# EAGLE board V8Print1 (EAGLE 5.12), part 1 of 2
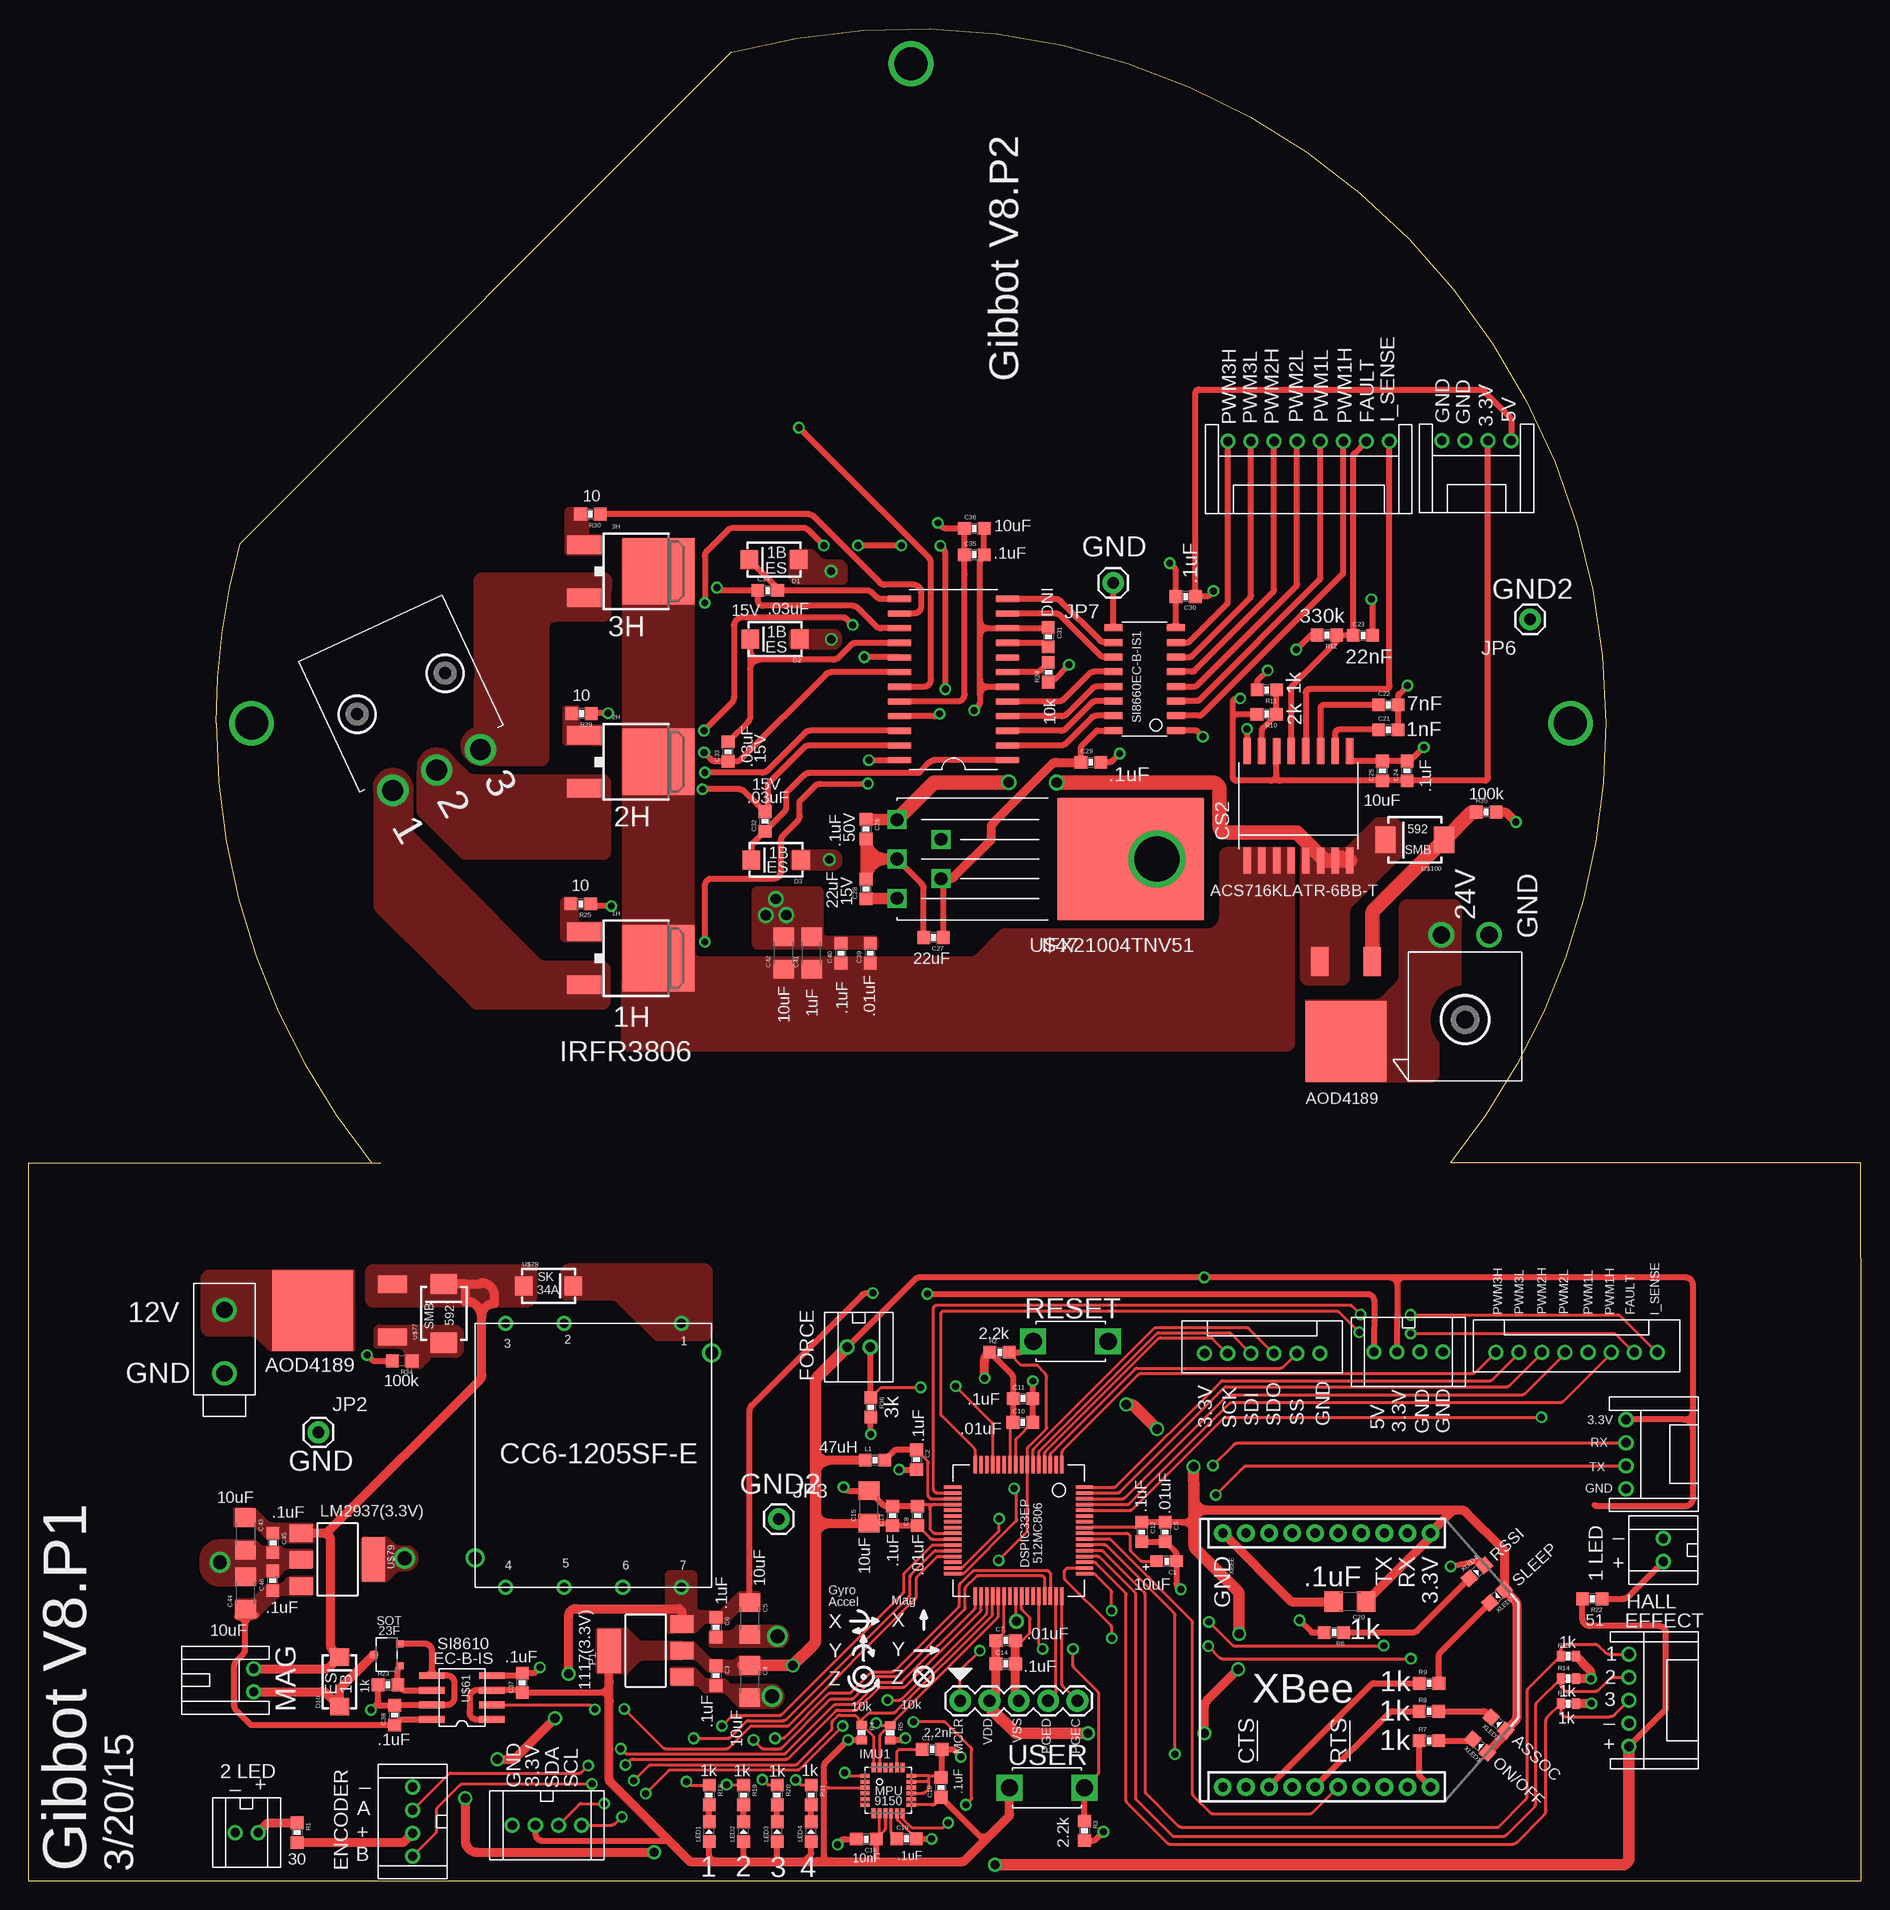
[diagram p0: board, top side]
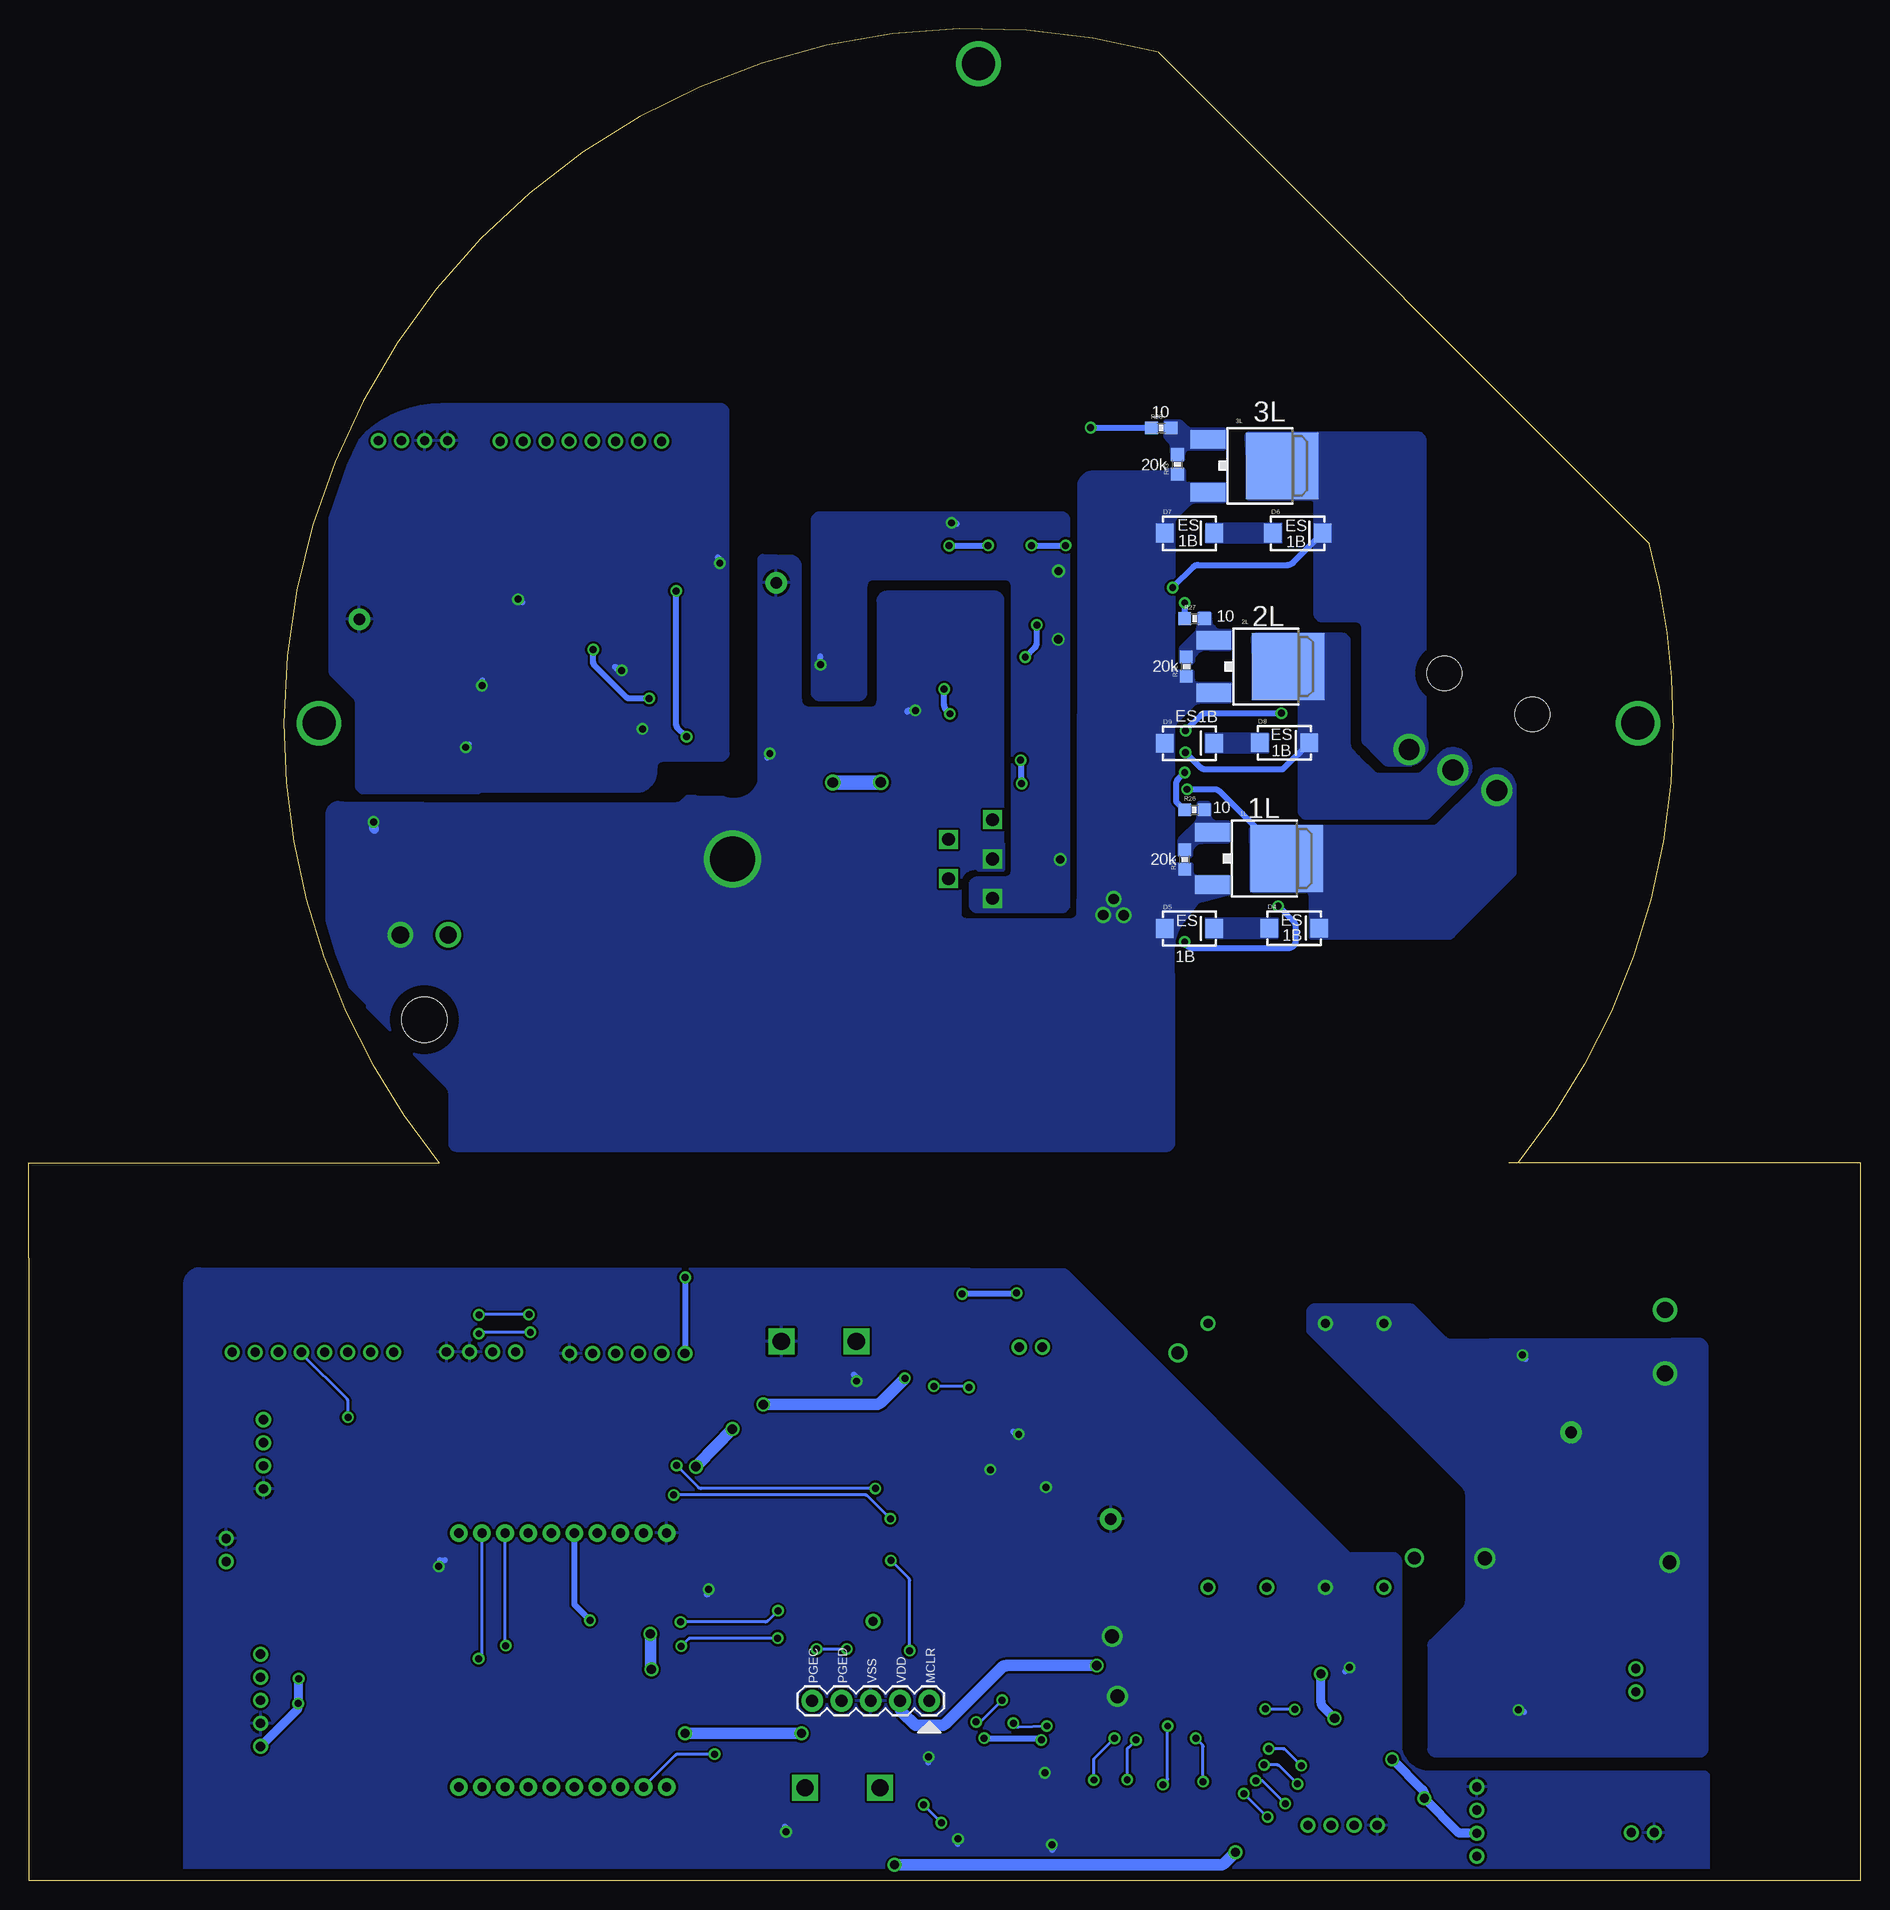
[diagram p1: board, bottom side, seen from below]

Size 158.75 x 160.48 mm. Coordinates in mm from the lower left corner, seen from the top.
Outline: 123.19,62.21 arc39 136.65,100.31 arc105 60.87,158.46 18.31,115.89 arc15 16.25,100.31 arc39 29.72,62.21
Outline: 30.48,62.2 0,62.2 0,53.97 0,0 158.75,0 158.75,53.31 158.75,53.97 158.75,62.2 123.19,62.2
Copper layers (1*16): Top 0.035mm / dielectric 1.5mm / Bottom 0.035mm
Design rules "default": minimum track width 10mil, minimum drill 24mil, track to track 8mil, track to pad 8mil, pad to pad 8mil, via to via 8mil, smd to smd 8mil, copper to edge 40mil, drill to drill 8mil, minimum pad ring 10mil, minimum via ring 8mil, stop-mask expansion 4mil, vias tented up to drill 0mil, thermal gap 10mil

## Footprints (pad centres in the part's own frame; a part is rotated, then mirrored left to right if it is on the bottom)
DPAK = smd 5.791 x 6.274: D 0,1.587 | smd 1.6 x 3: G -2.286,-4.851; S 2.286,-4.851
0603-POL = smd 1.1 x 1: + 0.85,0; - -0.85,0
0603 = smd 1.1 x 1.1: 1 -0.85,0; 2 0.85,0
1206 = smd 1.6 x 1.8: 1 -1.4,0; 2 1.4,0
SOIC16-W = smd 0.65 x 2.25: 1 -4.445,-4.75; 2 -3.175,-4.75; 3 -1.905,-4.75; 4 -0.635,-4.75; 5 0.635,-4.75; 6 1.905,-4.75; 7 3.175,-4.75; 8 4.445,-4.75; 9 4.445,4.75; 10 3.175,4.75; 11 1.905,4.75; 12 0.635,4.75; 13 -0.635,4.75; 14 -1.905,4.75; 15 -3.175,4.75; 16 -4.445,4.75
SMA-DIODE = smd 1.52 x 1.63: A -2.15,0; C 2.15,0
LGA24_4X4 = smd 0.8 x 0.35: 1 -2,1.25; 2 -2,0.75; 3 -2,0.25; 4 -2,-0.25; 5 -2,-0.75; 6 -2,-1.25; 13 2,-1.25; 14 2,-0.75; 15 2,-0.25; 16 2,0.25; 17 2,0.75; 18 2,1.25 | smd 0.35 x 0.85: 7 -1.25,-1.975; 8 -0.75,-1.975; 9 -0.25,-1.975; 10 0.25,-1.975; 11 0.75,-1.975; 12 1.25,-1.975; 19 1.25,1.975; 20 0.75,1.975; 21 0.25,1.975; 22 -0.25,1.975; 23 -0.75,1.975; 24 -1.25,1.975
1X01_TEST = drill 0.762 round: 1 0,0
1X01 = drill 1.016 pad 1.88 round: 1 0,0
JST-4-PH-TH = drill 0.8 round: 1 -3,-6.35; 2 -1,-6.35; 3 1,-6.35; 4 3,-6.35
JST-4-PH-V = drill 0.8 round: 1 -3,0; 2 -1,0; 3 1,0; 4 3,0
MOLEX-2-MINIFITJR-V2 = drill 1.397 round: P$1 0,0; P$2 0,5.512
JST-2-PH-V = drill 0.8 round: 1 -1,0; 2 1,0
JST-2-PH-TH = drill 0.8 round: 1 -1,-6.35; 2 1,-6.35
MOLEX-3-MINIFITJR-RA = drill 1.803 round: 1 4.191,13.538; 2 0,13.538; 3 -4.191,13.538 | hole 3: -4.204,6.248; 4.204,6.248
TE-MINIMATENLOK-2 = drill 1.48 round: 1 -2.07,12.67; 2 2.07,12.67 | hole 3.91: 0,5.33
0603-DIODE = smd 1.1 x 1.1: AN -0.85,0; CAT 0.85,0
SOT23F = smd 0.6 x 0.65: D 0,1.125; G -0.95,-1.125; S 0.95,-1.125
SOIC24-W = smd 0.533 x 1.981: 1 -6.985,-4.686; 2 -5.715,-4.686; 3 -4.445,-4.686; 4 -3.175,-4.686; 5 -1.905,-4.686; 6 -0.635,-4.686; 7 0.635,-4.686; 8 1.905,-4.686; 9 3.175,-4.686; 10 4.445,-4.686; 11 5.715,-4.686; 12 6.985,-4.686; 13 6.985,4.686; 14 5.715,4.686; 15 4.445,4.686; 16 3.175,4.686; 17 1.905,4.686; 18 0.635,4.686; 19 -0.635,4.686; 20 -1.905,4.686; 21 -3.175,4.686; 22 -4.445,4.686; 23 -5.715,4.686; 24 -6.985,4.686
SOT223 = smd 1.499 x 2.007: 1 -2.261,-3.15; 2 0.025,-3.15; 3 2.311,-3.15 | smd 3.81 x 2.007: 4 0,3.15
CC6-2405SF-E = drill 0.8 round: 1 -11.43,7.62; 2 -11.43,-2.54; 3 -11.43,-7.62; 4 11.43,-7.62; 5 11.43,-2.54; 6 11.43,2.54; 7 11.43,7.62 | drill 1.1 round: P$9 8.89,-10.25; P$10 -8.89,10.25
1X05-PICKIT3 = drill 1.016 pad 1.88 round: MCLR 1.27,-1.016; PGEC 11.43,-1.016; PGED 8.89,-1.016; VDD 3.81,-1.016; VSS 6.35,-1.016
0402 = smd 0.7 x 0.9: 1 -0.65,0; 2 0.65,0
TACTILE_SWITCH = drill 1.5 square: 1 -3.25,0; 2 3.25,0
TQFP64_10X10 = smd 1.5 x 0.3: 1 -5.7,3.75; 2 -5.7,3.25; 3 -5.7,2.75; 4 -5.7,2.25; 5 -5.7,1.75; 6 -5.7,1.25; 7 -5.7,0.75; 8 -5.7,0.25; 9 -5.7,-0.25; 10 -5.7,-0.75; 11 -5.7,-1.25; 12 -5.7,-1.75; 13 -5.7,-2.25; 14 -5.7,-2.75; 15 -5.7,-3.25; 16 -5.7,-3.75; 33 5.7,-3.75; 34 5.7,-3.25; 35 5.7,-2.75; 36 5.7,-2.25; 37 5.7,-1.75; 38 5.7,-1.25; 39 5.7,-0.75; 40 5.7,-0.25; 41 5.7,0.25; 42 5.7,0.75; 43 5.7,1.25; 44 5.7,1.75; 45 5.7,2.25; 46 5.7,2.75; 47 5.7,3.25; 48 5.7,3.75 | smd 0.3 x 1.5: 17 -3.75,-5.7; 18 -3.25,-5.7; 19 -2.75,-5.7; 20 -2.25,-5.7; 21 -1.75,-5.7; 22 -1.25,-5.7; 23 -0.75,-5.7; 24 -0.25,-5.7; 25 0.25,-5.7; 26 0.75,-5.7; 27 1.25,-5.7; 28 1.75,-5.7; 29 2.25,-5.7; 30 2.75,-5.7; 31 3.25,-5.7; 32 3.75,-5.7; 49 3.75,5.7; 50 3.25,5.7; 51 2.75,5.7; 52 2.25,5.7; 53 1.75,5.7; 54 1.25,5.7; 55 0.75,5.7; 56 0.25,5.7; 57 -0.25,5.7; 58 -0.75,5.7; 59 -1.25,5.7; 60 -1.75,5.7; 61 -2.25,5.7; 62 -2.75,5.7; 63 -3.25,5.7; 64 -3.75,5.7
JST-6-PH-V = drill 0.8 round: 1 -5,0; 2 -3,0; 3 -1,0; 4 1,0; 5 3,0; 6 5,0
SOIC16-N = smd 0.6 x 1.55: 1 -4.445,-2.7; 2 -3.175,-2.7; 3 -1.905,-2.7; 4 -0.635,-2.7; 5 0.635,-2.7; 6 1.905,-2.7; 7 3.175,-2.7; 8 4.445,-2.7; 9 4.445,2.7; 10 3.175,2.7; 11 1.905,2.7; 12 0.635,2.7; 13 -0.635,2.7; 14 -1.905,2.7; 15 -3.175,2.7; 16 -4.445,2.7
TO220-5 = drill 1.1 square: 1 3.81,-3.404; 2 0,-1.702; 3 3.81,0; 4 0,1.702; 5 3.81,3.404 | smd 12.7 x 10.541: PAD -16.434,0 | drill 3.937 round: PAD2 -18.72,0
SOIC8-N = smd 2.2 x 0.6: 1 -2.6,1.905; 2 -2.6,0.635; 3 -2.6,-0.635; 4 -2.6,-1.905; 5 2.6,-1.905; 6 2.6,-0.635; 7 2.6,0.635; 8 2.6,1.905
4-40 = drill 2.845 round: P$1 0,0
D-PAK = smd 7.01 x 7.01: D 0,0 | smd 1.499 x 2.515: G -2.286,-6.909; S 2.286,-6.909
SMB-DIODE = smd 1.75 x 2.3: A -2.54,0; C 2.54,0
JST-5-PH = drill 0.8 round: 1 -4,0; 2 -2,0; 3 0,0; 4 2,0; 5 4,0
JST-8-PH-V = drill 0.8 round: 1 -7,0; 2 -5,0; 3 -3,0; 4 -1,0; 5 1,0; 6 3,0; 7 5,0; 8 7,0
JST-8-PH-TH = drill 0.8 round: 1 -7,-6.35; 2 -5,-6.35; 3 -3,-6.35; 4 -1,-6.35; 5 1,-6.35; 6 3,-6.35; 7 5,-6.35; 8 7,-6.35
XBEE-SILK = drill 0.8 pad 1.524 round: 1 -11,20; 2 -11,18; 3 -11,16; 4 -11,14; 5 -11,12; 6 -11,10; 7 -11,8; 8 -11,6; 9 -11,4; 10 -11,2; 11 11,2; 12 11,4; 13 11,6; 14 11,8; 15 11,10; 16 11,12; 17 11,14; 18 11,16; 19 11,18; 20 11,20

## Placement (x,y rotation side)
1H  IRFR3806  [DPAK]  52.98,79.94 270 top
1L  IRFR3806  [DPAK]  51.33,88.58 270 bottom
2H  IRFR3806  [DPAK]  52.98,96.96 270 top
2L  IRFR3806  [DPAK]  51.2,105.21 270 bottom
3H  IRFR3806  [DPAK]  52.98,113.47 270 top
3L  IRFR3806  [DPAK]  51.71,122.61 270 bottom
C1  10uF  [0603-POL]  98.6,27.69 180 top
C2  .1uF  [0603]  76.92,36.49 270 top
C3  .1uF  [0603]  59.55,17.77 270 top
C4  10uF  [1206]  62.47,17.26 270 top
C5  10uF  [1206]  62.47,22.72 270 top
C6  .1uF  [0603]  59.55,21.96 270 top
C7  .01uF  [0603]  84.66,20.82 0 top
C8  .01uF  [0603]  77.01,31.62 90 top
C9  .01uF  [0603]  98.48,30.23 270 top
C10  .01uF  [0603]  86.14,39.71 0 top
C11  .1uF  [0603]  86.16,41.78 0 top
C12  .1uF  [0603]  96.44,30.23 270 top
C13  .1uF  [0603]  74.85,31.62 90 top
C14  .1uF  [0603]  84.66,18.8 0 top
C15  10uF  [1206]  72.82,32.39 90 top
C16  .1uF  [0603]  79.04,8.08 90 top
C17  2.2nF  [0603]  78.28,11.38 0 top
C18  10nF  [0603]  72.58,3.61 180 top
C19  .1uF  [0603]  76.06,3.63 0 top
C20  .1uF  [1206]  114.49,24.18 180 top
C21  1nF  [0603]  117.82,99.74 0 top
C22  7nF  [0603]  117.82,101.9 0 top
C23  22nF  [0603]  115.62,107.92 0 top
C24  .1uF  [0603]  119.44,96.17 90 top
C25  10uF  [0603]  117.31,96.17 90 top
C26  .1uF 48V  [0603]  72.55,91.14 270 top
C27  22uF  [0603]  78.4,81.74 180 top
C28  22uF 15V  [0603]  72.55,85.94 90 top
C29  .1uF  [0603]  92.04,96.92 0 top
C30  .1uF  [0603]  100.25,111.28 180 top
C31  DNI  [0603]  88.35,107.78 270 top
C32  .03uF 15V  [0603]  63.8,91.8 90 top
C33  .03uF 15V  [0603]  60.6,97.85 90 top
C34  .03uF 15V  [0603]  64.03,111.82 0 top
C35  .1uF  [0603]  81.94,114.9 0 top
C36  10uF  [0603]  81.94,117.19 0 top
C37  .1uF  [0603]  42.76,17.14 90 top
C38  .1uF  [0603]  31.7,14.35 90 top
C39  .01uF  [0603]  72.92,80.39 90 top
C40  .1uF  [0603]  70.38,80.39 90 top
C41  1uF  [1206]  67.84,80.39 90 top
C42  10uF  [1206]  65.43,80.39 90 top
C43  10uF  [1206]  18.77,30.06 270 top
C44  10uF  [1206]  18.78,24.96 90 top
C45  .1uF  [0603]  21.16,29.27 270 top
C46  .1uF  [0603]  21.15,26 90 top
CS2  ACS716KLATR-6BB-T  [SOIC16-W]  110.03,93.15 0 top
D1  ES1B  [SMA-DIODE]  64.58,114.49 180 top
D2  ES1B  [SMA-DIODE]  64.67,107.6 180 top
D3  ES1B  [SMA-DIODE]  64.77,88.46 180 top
D4  ES1B  [SMA-DIODE]  49.1,82.54 0 bottom
D5  ES1B  [SMA-DIODE]  58.16,82.52 0 bottom
D6  ES1B  [SMA-DIODE]  48.79,116.77 0 bottom
D7  ES1B  [SMA-DIODE]  58.16,116.77 0 bottom
D8  ES1B  [SMA-DIODE]  49.93,98.61 0 bottom
D9  ES1B  [SMA-DIODE]  58.16,98.57 0 bottom
D10  ES1B  [SMA-DIODE]  26.92,17.23 90 top
IMU1  MPU-9150  [LGA24_4X4]  74.47,7.82 0 top
JP1  M01TEST  [1X01_TEST]  85.59,22.48 0 top
JP2  GND  [1X01]  25.1,38.85 0 top
JP3  GND2  [1X01]  64.99,31.34 0 top
JP4  [JST-4-PH-TH]  144.77,36.96 270 top
JP5  [JST-4-PH-V]  33.26,5.12 270 top
JP6  GND2  [1X01]  130.11,109.31 180 top
JP7  GND1  [1X01]  93.98,112.48 180 top
JP8  [JST-4-PH-V]  119.56,45.83 0 top
JP9  [JST-4-PH-TH]  125.46,118.44 180 top
JP10  [MOLEX-2-MINIFITJR-V2]  16.95,43.95 0 top
JP11  [JST-2-PH-V]  141.66,28.65 270 top
JP12  [JST-2-PH-V]  71.92,46.24 0 top
JP13  [JST-2-PH-V]  18.87,4.17 0 top
JP14  [JST-2-PH-TH]  13.13,17.37 90 top
JP15  [MOLEX-3-MINIFITJR-RA]  29.62,108.53 205 top
JP16  [JST-4-PH-V]  44.89,4.81 0 top
JP17  [TE-MINIMATENLOK-2]  124.48,69.29 0 top
L1  47uH  [0603]  73.33,36.45 0 top
LED1  [0603-DIODE]  58.97,4.25 90 top
LED2  [0603-DIODE]  61.94,4.25 90 top
LED3  [0603-DIODE]  64.86,4.25 90 top
LED4  [0603-DIODE]  67.81,4.25 90 top
M1  N-MOSSOT23F  [SOT23F]  31.01,19.58 90 top
MD1  HIP4086  [SOIC24-W]  80.14,104.1 90 top
P1  LINEAR-REG1117  [SOT223]  53.45,19.93 90 top
P2  DC-DC-CONVERTER1.2A  [CC6-2405SF-E]  48.93,36.86 270 top
PROG  [1X05-PICKIT3]  79.44,16.61 0 top
PROG1  [1X05-PICKIT3]  79.44,14.58 180 bottom
R1  30  [0603]  23.25,4.17 270 top
R2  2.2k  [0603]  84.12,45.8 0 top
R3  2.2k  [0603]  91.48,4.33 270 top
R4  10k  [0402]  72.17,12.84 270 top
R5  10k  [0402]  74.65,12.81 270 top
R6  1k  [0603]  113.11,21.51 180 top
R7  1k  [0603]  121.34,12.14 0 top
R8  1k  [0603]  121.34,14.68 0 top
R9  1k  [0603]  121.35,17.11 0 top
R10  2k  [0603]  107.27,101.09 180 top
R11  1k  [0603]  107.29,103.19 180 top
R12  330k  [0603]  112.49,107.94 180 top
R13  1k  [0402]  133.4,15.34 0 top
R14  1k  [0402]  133.4,17.51 0 top
R15  1k  [0402]  133.4,19.47 0 top
R18  1k  [0603]  58.97,7.43 270 top
R19  1k  [0603]  61.94,7.43 270 top
R20  1k  [0603]  64.86,7.43 270 top
R21  1k  [0603]  67.81,7.43 270 top
R22  51  [0603]  135.5,24.43 180 top
R23  1k  [0603]  31.13,16.98 0 top
R24  10k  [0603]  88.35,104.73 90 top
R25  10  [0603]  47.83,84.65 180 top
R26  10  [0603]  57.75,92.81 0 bottom
R27  10  [0603]  57.72,109.38 0 bottom
R28  10  [0603]  60.62,125.9 0 bottom
R29  10  [0603]  47.9,101.15 180 top
R30  10  [0603]  48.66,118.42 180 top
R31  20k  [0603]  58.58,88.5 90 bottom
R32  20k  [0603]  58.44,105.21 90 bottom
R33  20k  [0603]  59.21,122.74 90 bottom
R34  100k  [0603]  32.36,45.05 180 top
R35  100k  [0603]  126.3,92.62 0 top
R36  3k  [0603]  72.96,41.02 270 top
RESET1  TACTILE_SWITCH  [TACTILE_SWITCH]  90.28,46.74 0 top
U$1  DSPIC33EP512MC806  [TQFP64_10X10]  85.78,30.35 270 top
U$38  JST-6-PH-V  [JST-6-PH-V]  106.9,45.71 0 top
U$46  DIGITAL-ISOLATOR-6CHSI8660EC-B-IS1  [SOIC16-N]  96.7,104.13 90 top
U$47  IFX21004TNV51  [TO220-5]  79.04,88.54 180 top
U$61  DIGITAL-ISOLATOR-1CHSOIC8-N  [SOIC8-N]  37.54,15.88 180 top
U$64  4-40  [4-40]  76.45,157.46 90 top
U$65  4-40  [4-40]  133.6,100.31 90 top
U$66  4-40  [4-40]  19.3,100.31 90 top
U$75  AOD4189  [D-PAK]  24.61,49.42 90 top
U$77  10V  [SMB-DIODE]  35.95,49.17 90 top
U$78  SK34A  [SMA-DIODE]  45.05,51.55 0 top
U$79  LINEAR-REGLM2937  [SOT223]  26.75,27.85 270 top
U$82  JST-5-PH  [JST-5-PH]  138.67,15.63 270 top
U$84  JST-8-PH-V  [JST-8-PH-V]  134.12,45.8 0 top
U$88  MO8JST-PH-TH  [JST-8-PH-TH]  110.91,118.39 180 top
U$98  AOD4189  [D-PAK]  114.14,72.74 180 top
U$100  10V  [SMB-DIODE]  120.11,90.19 180 top
USER1  TACTILE_SWITCH  [TACTILE_SWITCH]  88.24,8.05 0 top
XBEE  XBEETH  [XBEE-SILK]  101.47,19.13 270 top
XLED1  [0603-DIODE]  125.77,11.67 138 top
XLED2  [0603-DIODE]  127.24,24.64 222 top
XLED3  [0603-DIODE]  127.36,13.59 138 top
XLED4  [0603-DIODE]  125.49,26.77 42 top

## Library data of the parts
1H 1L 2H 2L 3H 3L C1-C46 CS2 D1-D10 IMU1 JP1-JP17 L1 LED1-LED4 M1 MD1 P1 P2 PROG PROG1 R1-R15 R18-R33 R35 R36 RESET1 U$1 U$46 U$47 U$61 U$78 U$79 U$88 U$100 USER1 XBEE XLED1-XLED4 = GibbotV5
R34 U$77 = Gibbot v4
U$38 U$64-U$66 U$75 U$82 U$84 U$98 = GibbotV6

## Nets
1HO: 1H.G R25.2
1HS: 1H.S 1L.D C32.2 D4.C JP15.1 MD1.23
1LO: 1L.G R26.2 R31.2
2HO: 2H.G R29.2
2HS: 2H.S 2L.D C33.1 D8.C JP15.2 MD1.18
2LO: 2L.G R27.2 R32.2
3.3V: C3.1 C4.1 C7.1 C8.1 C9.1 C10.1 C11.1 C12.1 C13.1 C14.1 C15.1 C16.1 C18.1 C20.1 C37.1 IMU1.3 IMU1.8 IMU1.9 IMU1.13 JP4.1 JP8.2 JP12.1 JP16.2 L1.1 LED1.AN LED2.AN LED3.AN LED4.AN P1.2 P1.4 PROG1.VDD PROG.VDD R2.1 R4.2 R5.2 U$1.10 U$1.26 U$1.38 U$1.57 U$38.1 U$61.1 U$61.3 USER1.1 XBEE.1 XLED1.AN XLED2.AN XLED3.AN
3.3V1: C24.1 C25.1 CS2.14 JP9.2 R10.2 R12.2
3.3V_MAG: C38.1 C44.1 C46.1 U$61.8 U$79.3
3HO: 3H.G R30.2
3HS: 3H.S 3L.D C34.1 D6.C JP15.3 MD1.15
3LO: 3L.G R28.2 R33.2
5V1: C30.1 JP9.1 U$46.1
5V2: C5.1 C6.1 JP5.3 JP8.1 P1.3 P2.7 R1.2 R13.2 R14.2 R15.2 R22.2 U$82.5
5V3: C27.1 C29.1 U$46.16 U$47.4
12V: C43.1 C45.1 D10.C JP14.2 U$75.S U$77.C U$78.A U$79.1
15V: C28.1 C35.1 C36.1 D1.A D2.A D3.A MD1.20 R24.1 U$47.5
24V: JP17.1 U$98.D
24V_IN: C26.1 CS2.5 CS2.6 CS2.7 CS2.8 U$47.1 U$98.S U$100.C
CTS: U$1.54 XBEE.12
FAULT: U$1.16 U$84.7
FAULT1: C23.1 CS2.13 R12.1 U$88.2
FORCE: JP12.2 R36.1 U$1.13
GND: C38.2 C43.2 C44.2 C45.2 C46.2 JP2.1 JP10.P$1 M1.S P2.2 P2.3 R23.1 R34.2 U$61.5 U$61.7 U$79.2 U$79.4
GND1: C21.2 C22.2 C23.2 C24.2 C25.2 C30.2 CS2.9 CS2.16 JP6.1 JP9.3 JP9.4 R11.2 U$46.8
GND2: C1.- C2.2 C3.2 C4.2 C5.2 C6.2 C7.2 C8.2 C9.2 C10.2 C11.2 C12.2 C13.2 C14.2 C15.2 C16.2 C17.2 C18.2 C19.2 C20.2 C37.2 IMU1.1 IMU1.11 IMU1.15 IMU1.17 IMU1.18 JP3.1 JP4.4 JP5.1 JP8.3 JP8.4 JP11.1 JP13.1 JP16.1 P1.1 P2.5 PROG1.VSS PROG.VSS R3.2 R36.2 RESET1.2 U$1.9 U$1.20 U$1.25 U$1.41 U$38.6 U$61.4 U$82.4 XBEE.10 XLED4.CAT
GND3: 1L.S 2L.S 3L.S C26.2 C27.2 C28.2 C29.2 C31.1 C35.2 C36.2 C39.2 C40.2 C41.2 C42.2 D5.A D7.A D9.A JP7.1 JP17.2 MD1.6 MD1.10 R31.1 R32.1 R33.1 R35.2 U$46.9 U$47.3 U$47.PAD U$47.PAD2
HALL1: R15.1 U$1.53 U$82.1
HALL2: R14.1 U$1.52 U$82.2
HALL3: R13.1 U$1.51 U$82.3
I_SENSE: U$1.18 U$84.8
I_SENSE1: CS2.12 U$88.1
IMU_INT1: IMU1.12 U$1.35
LED1: R18.1 U$1.28
LED2: R19.1 U$1.27
LED3: R20.1 U$1.45
LED4: R21.1 U$1.46
MCLR1: PROG1.MCLR PROG.MCLR R2.2 RESET1.1 U$1.7
MOTOR+: 1H.D 2H.D 3H.D C39.1 C40.1 C41.1 C42.1 CS2.1 CS2.2 CS2.3 CS2.4
N$2: R7.2 XLED1.CAT
N$3: R8.2 XLED3.CAT
N$4: C1.+ U$1.56
N$5: R9.2 XLED2.CAT
N$6: C2.1 L1.2 U$1.19
N$7: JP10.P$2 U$75.D
N$8: JP13.2 R1.1
N$9: JP1.1 U$1.40
N$11: LED1.CAT R18.2
N$12: P2.1 U$78.C
N$13: LED2.CAT R19.2
N$14: LED3.CAT R20.2
N$15: R34.1 U$75.G U$77.A
N$16: C17.1 IMU1.20
N$17: LED4.CAT R21.2
N$18: C19.1 IMU1.10
N$19: R6.2 XBEE.6
N$20: R6.1 XLED4.AN
N$21: R7.1 XBEE.20
N$23: R35.1 U$98.G U$100.A
N$25: R8.1 XBEE.15
N$26: R9.1 XBEE.13
N$28: CS2.15 R10.1 R11.1
N$29: C21.1 CS2.10
N$31: C22.1 CS2.11
N$38: MD1.24 R25.1
N$39: MD1.22 R26.1
N$40: MD1.21 R27.1
N$41: MD1.19 R28.1
N$42: MD1.17 R29.1
N$43: JP11.2 R22.1
N$45: MD1.14 R30.1
N$47: C31.2 MD1.9
N$48: MD1.7 R24.2
N$49: D4.A D5.C
N$50: D6.A D7.C
N$51: D8.A D9.C
N$52: C32.1 D3.C MD1.1
N$55: C34.2 D1.C MD1.13
N$56: C33.2 D2.C MD1.16
N$57: M1.G R23.2 U$61.6
N$58: D10.A JP14.1 M1.D
PGEC2: PROG1.PGEC PROG.PGEC U$1.48
PGED2: PROG1.PGED PROG.PGED U$1.47
PWM1H: U$1.61 U$84.6
PWM1H1: U$46.2 U$88.3
PWM1HO: MD1.2 U$46.15
PWM1L: U$1.60 U$84.5
PWM1L1: U$46.3 U$88.4
PWM1LO: MD1.3 U$46.14
PWM2H: U$1.63 U$84.3
PWM2H1: U$46.5 U$88.6
PWM2HO: MD1.5 U$46.12
PWM2L: U$1.62 U$84.4
PWM2L1: U$46.4 U$88.5
PWM2LO: MD1.4 U$46.13
PWM3H: U$1.1 U$84.1
PWM3H1: U$46.7 U$88.8
PWM3HO: MD1.12 U$46.10
PWM3L: U$1.64 U$84.2
PWM3L1: U$46.6 U$88.7
PWM3LO: MD1.11 U$46.11
RTS: U$1.55 XBEE.16
RX1: U$1.50 XBEE.2
RX2: JP4.2 U$1.32
SCK2: U$1.4 U$38.2
SCL1: IMU1.23 JP16.4 R5.1 U$1.37
SDA1: IMU1.24 JP16.3 R4.1 U$1.36
SDI2: U$1.5 U$38.3
SDO2: U$1.6 U$38.4
SS2: U$1.3 U$38.5
TOPMAGA: JP5.2 U$1.33
TOPMAGB: JP5.4 U$1.34
TOPMAGCON: U$1.29 U$61.2
TX1: U$1.49 XBEE.3
TX2: JP4.3 U$1.31
USER: R3.1 U$1.44 USER1.2